# Altium PCB front_test_pcb.PcbDoc
Units mil, origin at the board's own origin, x right, y up, seen from the top; angles counter-clockwise.
Board outline 1100 x 2420 mil, 2 copper layers (Top Layer, Bottom Layer); 12 components, 27 nets, 146 pads, 5 vias.
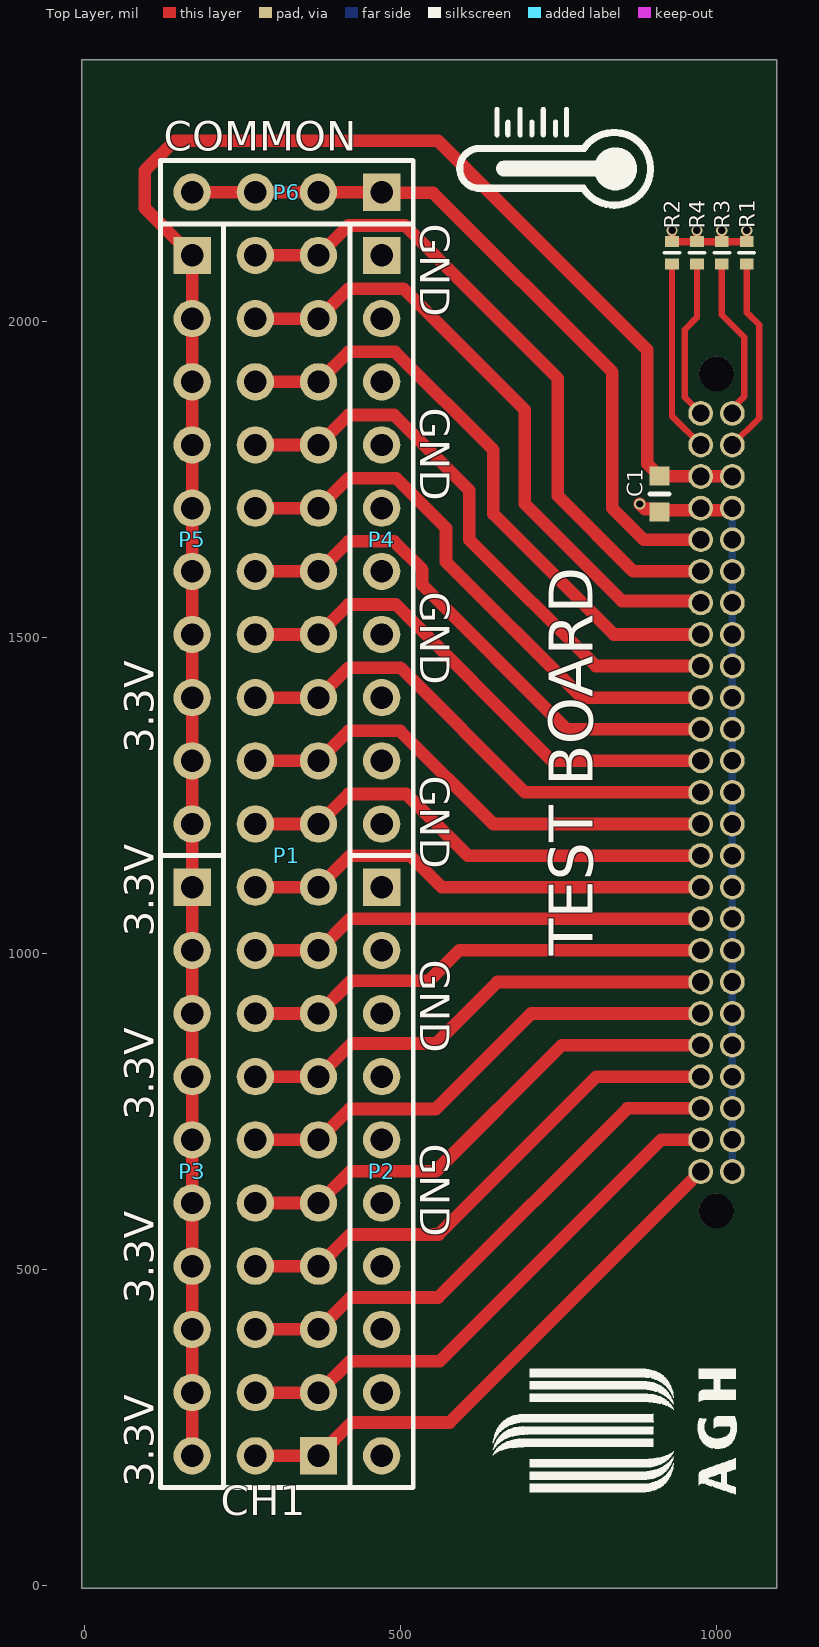
[diagram p0: Top Layer view]
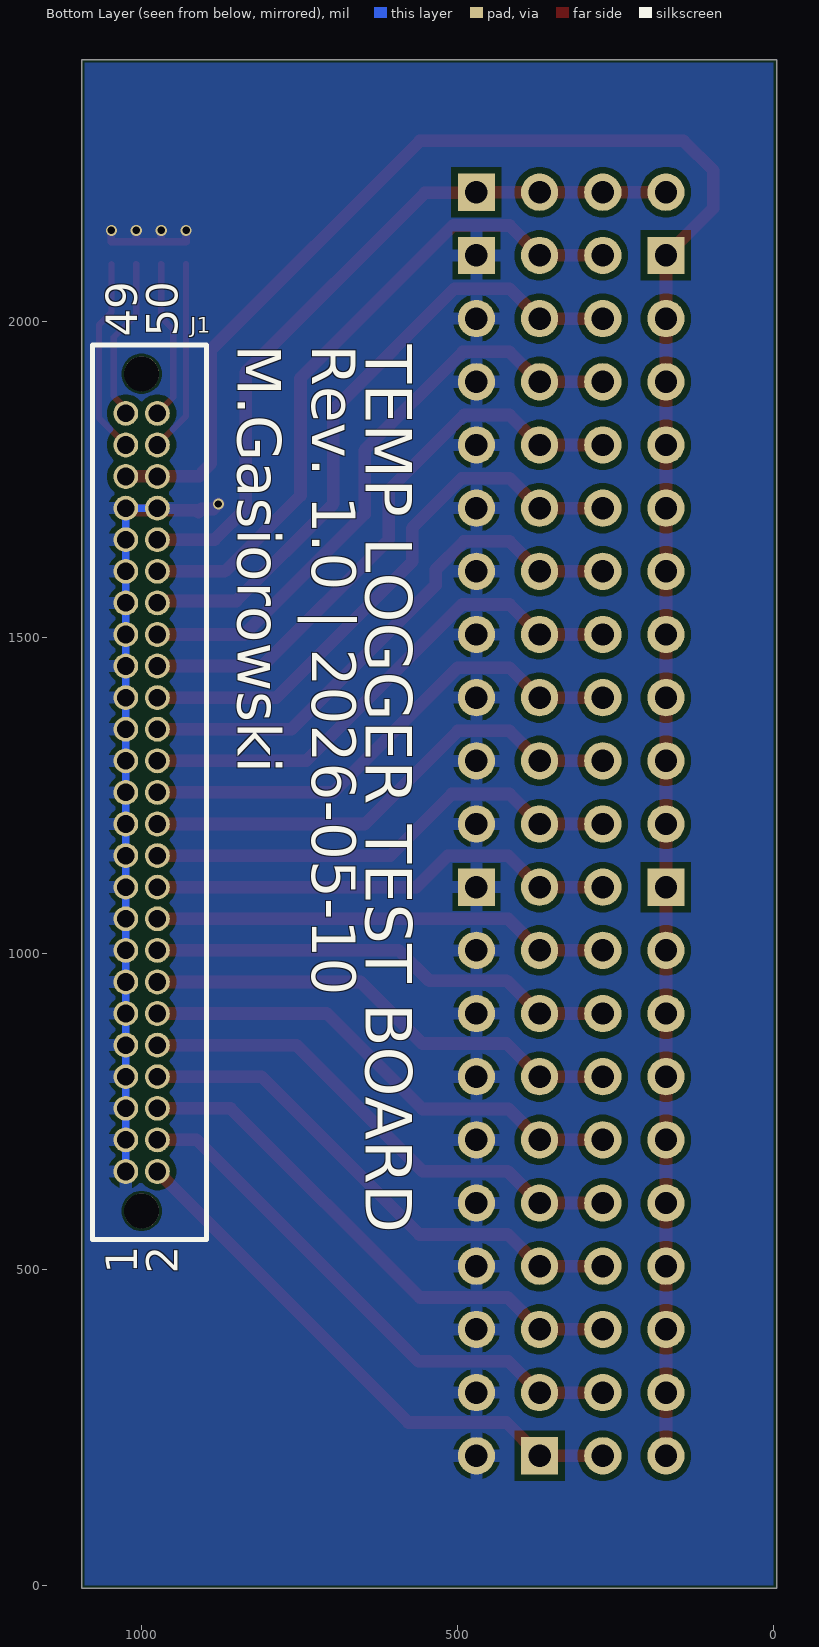
[diagram p1: Bottom Layer view, seen from below]
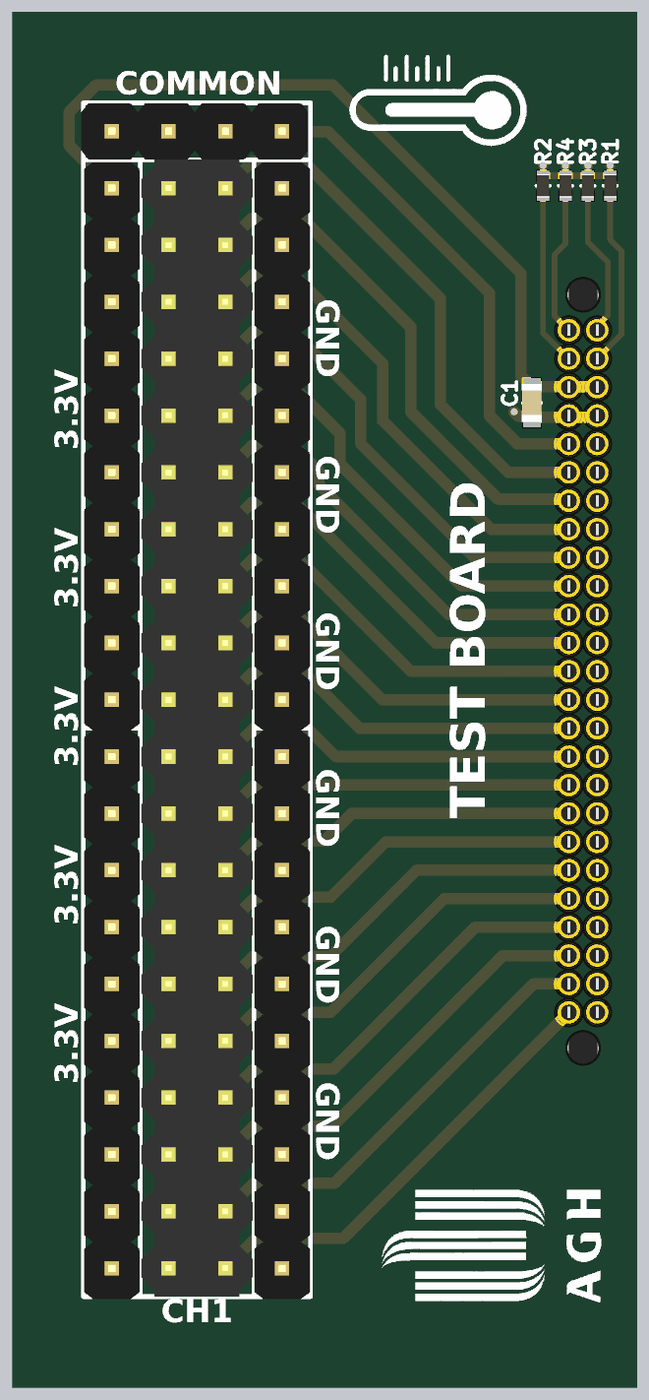
[diagram p2: 3D render of the assembled board from above, using the file's embedded part models]

## Layer stack, top to bottom
Top Solder: solder mask 0.4, Solder Resist, Dk 3.5
Top Layer: signal copper 1.4
Dielectric 1: dielectric 12.6, FR-4, Dk 4.8
Bottom Layer: signal copper 1.4
Bottom Solder: solder mask 0.4, Solder Resist, Dk 3.5

## Board outline
-5,-5 -5,2415 1095,2415 1095,-5

## Design rules (kind name [scope] priority, off if disabled: settings)
Clearance [All] p1: gap=4 ignorepadtopadclearanceinfootprint=FALSE except(3.15: Arc-SMDPad Track-SMDPad; 3.94: SMDPad-SMDPad; 4.72: THPad-THPad; 4.88: Arc-Via Track-Via SMDPad-Via THPad-Via Via-Via; 5: Arc-Fill Track-Fill SMDPad-Fill Via-Fill Via-Poly Via-Region Fill-Fill Fill-Poly Fill-Region Poly-Poly Poly-Region Region-Region; 7.87: Arc-THPad Track-THPad SMDPad-THPad; 8: Arc-Poly Arc-Region Track-Poly Track-Region SMDPad-Poly SMDPad-Region; 10: THPad-Fill THPad-Poly THPad-Region)
ComponentClearance [All] p1: gap=7.87 collisioncheckmode=3 verticalgap=7.87 showdistances=FALSE
DiffPairsRouting [All] p1: maxlimit=10 minlimit=5.91 mostfreqgap=5.91 toplayer_minwidth=15 toplayer_maxwidth=15 toplayer_prefwidth=15 bottomlayer_minwidth=15 bottomlayer_maxwidth=15 bottomlayer_prefwidth=15 maxuncoupledlength=500
HoleSize [All] p1: absolutevalues=TRUE maxlimit=314.96 minlimit=5.91 maxpercent=80.000 minpercent=20.000
HoleSize Testpoint [All] p2: absolutevalues=TRUE maxlimit=100 minlimit=1 maxpercent=80.000 minpercent=20.000
HoleSize TestPointUsage [All] p3: absolutevalues=TRUE maxlimit=100 minlimit=1 maxpercent=80.000 minpercent=20.000
HoleToHoleClearance [All] p1: gap=7.87 allowstackedmicrovias=TRUE
MinimumAnnularRing MinimumAnnularRing_via [IsVia] p1: minimumring=2.95
MinimumAnnularRing [All] p2: minimumring=5.12
MinimumSolderMaskSliver [All] p1: minsoldermaskwidth=0
PlaneClearance [All] p1: clearance=10
PolygonConnect [All] p1: thpad.connectstyle=Relief thpad.reliefconductorwidth=20 thpad.reliefentries=4 thpad.polygonreliefangle="90 Angle" thpad.airgapwidth=8 smdpad.connectstyle=Relief smdpad.reliefconductorwidth=12 smdpad.reliefentries=4 smdpad.polygonreliefangle="90 Angle" smdpad.airgapwidth=6 via.connectstyle=Direct via.reliefconductorwidth=20 via.reliefentries=4 via.polygonreliefangle="45 Angle" via.airgapwidth=10
RoutingVias [All] p1: holewidth=5.91 width=16.14 viastyle="Through Hole" minholewidth=5.91 minwidth=11.81 maxholewidth=118.11 maxwidth=236.22
SilkToSilkClearance [All] p1: silktosilkclearance=3.94
SilkToSolderMaskClearance [IsPad] p1: minsilkscreentomaskgap=2.13 clearancetoexposedcopper=TRUE
SolderMaskExpansion SolderMaskExpansion_VIA [IsVia] p1: expansion=4 istentingtop=TRUE
SolderMaskExpansion [All] p2: expansion=2 istentingtop=FALSE
SupplyNets "Schematic Supply Nets_4" [InNet('3V3-LTC')] p1: voltage=0.000
SupplyNets "Schematic Supply Nets_3" [InNet('GND')] p2: voltage=0.000
Width Width_50Ohm [InNetClass('50')] p1: maxlimit=14.47 minlimit=14.47 preferedwidth=14.47 impedanceprofiledriven=TRUE impedanceprofileid={9B03409D-0029-451A-AE6F-A7E986651E4C} minimp=50.000000 maximp=50.000000 favimp=50.000000
Width [All] p2: maxlimit=250 minlimit=4 preferedwidth=5 minimp=40.000000 maximp=100.000000 favimp=52.000000
Width Width_TopBottomOverLayer [OnLayer('Top Overlay')] p3: maxlimit=78.74 minlimit=5.91 preferedwidth=5.91
22 further rules are at their usual default settings.

## Components (designator, comment, footprint, x,y, rotation, side; value= is the part's Value field where it differs from the comment)
C1 "Ceramic X5R" C_0603_1608 909.96,1727.28 r270 top value=22uF
J1 "SAMTEC-SFM-125-01-X-D-A" SAMTEC-SFM-125-01-X-D-A 1000,1255 r90 bottom
P1 "Goldpin male" P_HEADER_2x20_2.54 320,1155 r90 top value=DS1021-2*20SF1-1
P2 "Goldpin" P_HEADER_1x10_2.54 470,655 r270 top value=DS1021-1*10SF11
P3 "Goldpin" P_HEADER_1x10_2.54 170,655 r270 top value=DS1021-1*10SF11
P4 "Goldpin" P_HEADER_1x10_2.54 470,1655 r270 top value=DS1021-1*10SF11
P5 "Goldpin" P_HEADER_1x10_2.54 170,1655 r270 top value=DS1021-1*10SF11
P6 "Goldpin" P_HEADER_1x4_2.54 320,2205 r180 top value=DS1021-1*4SF1-1
R1 "Resistor" R_0402_1005 1047.76,2109.17 r270 top value=1k
R2 "Resistor" R_0402_1005 929.65,2109.17 r90 top value=1k
R3 "Resistor" R_0402_1005 1008.39,2109.17 r270 top value=1k
R4 "Resistor" R_0402_1005 969.02,2109.17 r90 top value=1k

## Footprints (in the part's own frame and the unit in brackets; to place one, negate y for a bottom-side part, rotate by r counter-clockwise, add the part's x,y. Pads: shape width x height; smd on the part's side, far side on the other; paste and mask are expansions set on the pad)
C_0603_1608 [mm]
  rect 0.75x0.8 smd: 1(-0.725,0) 2(0.725,0)
  silkscreen extent 0,-0.38 0,0.38, body extent -0.85,-0.45 0.85,0.45, height 0.89
P_HEADER_1x4_2.54 [mm] "Connector; Header; 4 Position; Male"
  rect 1.5x1.5 hole 0.9: 1(-3.81,0)
  round 1.5 hole 0.9: 2(-1.27,0) 3(1.27,0) 4(3.81,0)
  silkscreen extent -5.08,-1.27 5.08,1.27, body extent -4.98,-1.25 5.18,1.25, height 8.2
P_HEADER_1x10_2.54 [mm] "Connector; Header; 10 Position; Male"
  rect 1.5x1.5 hole 0.9: 1(-11.43,0)
  round 1.5 hole 0.9: 2(-8.89,0) 3(-6.35,0) 4(-3.81,0) 5(-1.27,0) 6(1.27,0) 7(3.81,0) 8(6.35,0) 9(8.89,0) 10(11.43,0)
  silkscreen extent -12.7,-1.27 12.7,1.27, body extent -12.6,-1.25 12.8,1.25, height 8.2
P_HEADER_2x20_2.54 [mm] "Connector; Header"
  rect 1.5x1.5 hole 0.9: 1(-24.13,-1.27)
  round 1.5 hole 0.9: 2(-24.13,1.27) 3(-21.59,-1.27) 4(-21.59,1.27) 5(-19.05,-1.27) 6(-19.05,1.27) 7(-16.51,-1.27) 8(-16.51,1.27) 9(-13.97,-1.27) 10(-13.97,1.27) 11(-11.43,-1.27) 12(-11.43,1.27) 13(-8.89,-1.27) 14(-8.89,1.27) 15(-6.35,-1.27) 16(-6.35,1.27) 17(-3.81,-1.27) 18(-3.81,1.27) 19(-1.27,-1.27) 20(-1.27,1.27) 21(1.27,-1.27) 22(1.27,1.27) 23(3.81,-1.27) 24(3.81,1.27) 25(6.35,-1.27) 26(6.35,1.27) 27(8.89,-1.27) 28(8.89,1.27) 29(11.43,-1.27) 30(11.43,1.27) 31(13.97,-1.27) 32(13.97,1.27) 33(16.51,-1.27) 34(16.51,1.27) 35(19.05,-1.27) 36(19.05,1.27) 37(21.59,-1.27) 38(21.59,1.27) 39(24.13,-1.27) 40(24.13,1.27)
  silkscreen extent -25.4,-2.54 25.4,2.54, body extent -25.4,-2.5 25.4,2.5, height 8.4
R_0402_1005 [mm] "Chip Resistor, 2-Leads, Body 1.00x0.50mm, IPC High Density"
  rect 0.45x0.55 smd: 1(-0.45,0) 2(0.45,0)
  silkscreen extent 0,-0.3 0,0.3, body extent -0.53,-0.28 0.53,0.28, height 0.37
SAMTEC-SFM-125-01-X-D-A [mm]
  round 1 hole 0.71: 1(-15.24,0.635) 2(-15.24,-0.635) 3(-13.97,0.635) 4(-13.97,-0.635) 5(-12.7,0.635) 6(-12.7,-0.635) 7(-11.43,0.635) 8(-11.43,-0.635) 9(-10.16,0.635) 10(-10.16,-0.635) 11(-8.89,0.635) 12(-8.89,-0.635) 13(-7.62,0.635) 14(-7.62,-0.635) 15(-6.35,0.635) 16(-6.35,-0.635) 17(-5.08,0.635) 18(-5.08,-0.635) 19(-3.81,0.635) 20(-3.81,-0.635) 21(-2.54,0.635) 22(-2.54,-0.635) 23(-1.27,0.635) 24(-1.27,-0.635) 25(0,0.635) 26(0,-0.635) 27(1.27,0.635) 28(1.27,-0.635) 29(2.54,0.635) 30(2.54,-0.635) 31(3.81,0.635) 32(3.81,-0.635) 33(5.08,0.635) 34(5.08,-0.635) 35(6.35,0.635) 36(6.35,-0.635) 37(7.62,0.635) 38(7.62,-0.635) 39(8.89,0.635) 40(8.89,-0.635) 41(10.16,0.635) 42(10.16,-0.635) 43(11.43,0.635) 44(11.43,-0.635) 45(12.7,0.635) 46(12.7,-0.635) 47(13.97,0.635) 48(13.97,-0.635) 49(15.24,0.635) 50(15.24,-0.635)
  round 1.4 hole 1.4 unplated: ""(-16.828,0) ""(16.828,0)
  silkscreen extent -17.98,-2.61 17.98,1.97, body extent -17.84,-1.52 17.84,2.16, height 4.57

## Part data
C1: library part C_22uF_10V_X5R_0603_20, "Capacitor", Dielectric=X5R, Manufacturer=Murata, Manufacturer Part Number=GRM188R61A226ME15D, Tolerance (%)=20, Voltage=10V, HelpURL=https://www.mouser.pl/datasheet/2/281/1/GRM188R61A226ME15_02A-1985787.pdf, Part Number=C_22uF_10V_X5R_0603_20, SCH_Footprint=0603, Supplier 1=TME, Supplier 2="RS Components", Supplier 3=Farnell, Supplier 4=Mouser, Supplier 5=Digi-Key, Supplier 6=LCSC, Supplier Part Number 1=GRM188R61A226ME15D, Supplier Part Number 3=2426957, Supplier Part Number 4=81-GRM188R61A226ME5D, Supplier Part Number 5=490-10476-1-ND
J1: Package=None, Availability=Unavailable, MP=SAMTEC-SFM-125-01-X-D-A, Price=None
P1: library part P_HEADER_2x20_2.54, "Pin Header", Manufacturer=Connfly, Manufacturer Part Number=DS1021-2*20SF1-1, Supplier Part Number 1=ZL202-40G, HelpURL=https://www.tme.eu/Document/cc301e58a5da78cb543a94b5a5b7f06a/DS1021.pdf, Part Number=P_HEADER_2x20_2.54, SCH_Footprint="2x20 2.54mm", Supplier 1=TME, Supplier 2="RS Components", Supplier 3=Farnell, Supplier 4=Mouser, Supplier 5=Digi-Key, Supplier 6=LCSC
P2 P3 P4 P5: library part P_HEADER_1x10_2.54, "Pin Header", Manufacturer=Connfly, Manufacturer Part Number=DS1021-1*10SF11, Supplier Part Number 1=ZL201-10G, HelpURL=http://www.tme.eu/en/Document/cc301e58a5da78cb543a94b5a5b7f06a/DS1021.pdf, Part Number=P_HEADER_1x10_2.54, SCH_Footprint="1x10 2.54mm", Supplier 1=TME, Supplier 2="RS Components", Supplier 3=Farnell, Supplier 4=Mouser, Supplier 5=Digi-Key, Supplier 6=LCSC
P6: library part P_HEADER_1x4_2.54, "Pin Header", Manufacturer=Connfly, Manufacturer Part Number=DS1021-1*4SF1-1, Supplier Part Number 1=ZL201-04G, HelpURL=http://datasheet.octopart.com/DS1021-1%2A4SF1-1-Connfly-datasheet-65537859.pdf, Part Number=P_HEADER_1x4_2.54, SCH_Footprint="1x4 2.54mm", Supplier 1=TME, Supplier 2="RS Components", Supplier 3=Farnell, Supplier 4=Mouser, Supplier 5=Digi-Key, Supplier 6=LCSC
R1 R2 R3 R4: library part R_1k_0402_1, Manufacturer=Yageo, Manufacturer Part Number=RC0402FR-071K, Power=63mW, Tolerance=1%, Voltage=50V, HelpURL=http://www.tme.eu/pl/Document/1a2bc76e2be68b3b1670068306778ce6/rc0402yageo.pdf, Part Number=R_1k_0402_1, SCH_Footprint=0402, Supplier 1=TME, Supplier 2="RS Components", Supplier 3=Farnell, Supplier 4=Mouser, Supplier 5=Digi-Key, Supplier 6=LCSC, Supplier Part Number 1=RC0402FR-071K, Supplier Part Number 3=9239235, Supplier Part Number 4=603-RC0402FR-071KP, Supplier Part Number 5=311-1.00KLRCT-ND

## Via types
v1: diameter 17.72, hole 11.81, Top Layer to Bottom Layer, tented both sides, 5 vias

## Nets (pads, with @x,y where several pads share a name; then routed paths per layer and width w, separated by ;. In a path a pad name is that pad's centre, name@x,y a point inside that pad or via, vN(x,y) a via of type N, cw(c..) or ccw(c..) an arc to the next point about the centre after c; other vN are vias at no path point)
3V3-LTC: C1.1 J1.45 J1.46 P3.1 P3.2 P3.3 P3.4 P3.5 P3.6 P3.7 P3.8 P3.9 P3.10 P5.1 P5.2 P5.3 P5.4 P5.5 P5.6 P5.7 P5.8 P5.9 P5.10 | length 3340.9
  Top Layer w20: P3.10 P3.9 P3.8 P3.7 P3.6 P3.5 P3.4 P3.3 P3.2 P3.1 P5.10 P5.9 P5.8 P5.7 P5.6 P5.5 P5.4 P5.3 P5.2 P5.1 95,2180 95,2239.09 142.24,2286.34 559.57,2286.34 890.28,1955.63 890.28,1775.51 904.21,1761.57 904.21,1760.59 908.98,1755.83 C1.1 910.37,1755.41 1024.59,1755.41 J1.45
CH1_1: J1.2 P1.1 P1.2 | length 891.4
  Top Layer w20: P1.2 P1.1 422.6,257.6 577.6,257.6 J1.2
CH2_1: J1.4 P1.3 P1.4 | length 870.7
  Top Layer w20: P1.4 P1.3 419.44,354.43 561.87,354.43 912.44,705 J1.4
CH3_1: J1.6 P1.5 P1.6 | length 850
  Top Layer w20: P1.6 P1.5 420.45,455.45 559.39,455.45 858.94,755 J1.6
CH4_1: J1.8 P1.7 P1.8 | length 829.3
  Top Layer w20: P1.8 P1.7 420.22,555.22 560.2,555.22 809.98,805 J1.8
CH5_1: J1.10 P1.9 P1.10 | length 808.6
  Top Layer w20: P1.10 P1.9 420.4,655.4 555.58,655.4 755.19,855 J1.10
CH6_1: J1.12 P1.11 P1.12 | length 787.8
  Top Layer w20: P1.12 P1.11 418.81,753.81 555.63,753.81 706.82,905 J1.12
CH7_1: J1.14 P1.13 P1.14 | length 767.1
  Top Layer w20: P1.14 P1.13 422.6,857.6 555.69,857.6 653.09,955 J1.14
CH8_1: J1.16 P1.15 P1.16 | length 746.4
  Top Layer w20: P1.16 P1.15 421.88,956.88 544.62,956.88 592.74,1005 J1.16
CH9_1: J1.18 P1.17 P1.18 | length 725.7
  Top Layer w20: P1.18 P1.17 420,1055 J1.18
CH10_1: J1.20 P1.19 P1.20 | length 746.4
  Top Layer w20: P1.20 P1.19 420,1155 515,1155 565,1105 J1.20
CH11_1: J1.22 P1.21 P1.22 | length 765
  Top Layer w20: P1.22 P1.21 417.4,1252.4 508.9,1252.4 606.3,1155 J1.22
CH12_1: J1.24 P1.23 P1.24 | length 785.7
  Top Layer w20: P1.24 P1.23 417.4,1352.4 499.23,1352.4 646.63,1205 J1.24
CH13_1: J1.26 P1.25 P1.26 | length 806.4
  Top Layer w20: P1.26 P1.25 417.4,1452.4 499.56,1452.4 696.97,1255 J1.26
CH14_1: J1.28 P1.27 P1.28 | length 827.1
  Top Layer w20: P1.28 P1.27 417.4,1552.4 492.45,1552.4 739.85,1305 J1.28
CH15_1: J1.30 P1.29 P1.30 | length 862.1
  Top Layer w20: P1.30 P1.29 417.4,1652.4 489.63,1652.4 534.35,1607.68 534.35,1583.36 762.72,1355 J1.30
CH16_1: J1.32 P1.31 P1.32 | length 899.8
  Top Layer w20: P1.32 P1.31 417.4,1752.4 492.79,1752.4 571.78,1673.41 571.78,1620 786.77,1405 J1.32
CH17_1: J1.34 P1.33 P1.34 | length 935
  Top Layer w20: P1.34 P1.33 417.4,1852.4 489.63,1852.4 608.59,1733.45 608.59,1655.37 808.95,1455 J1.34
CH18_1: J1.36 P1.35 P1.36 | length 969.1
  Top Layer w20: P1.36 P1.35 417.4,1952.4 491.27,1952.4 646.84,1796.83 646.84,1695.79 837.63,1505 J1.36
CH19_1: J1.38 P1.37 P1.38 | length 1017.8
  Top Layer w20: P1.38 P1.37 417.4,2052.4 504.59,2052.4 696.64,1860.35 696.64,1711.66 850.39,1557.92 972.08,1557.92 J1.38
CH20_1: J1.40 P1.39 P1.40 | length 1060.4
  Top Layer w20: P1.40 P1.39 417.4,2152.4 506.93,2152.4 748.54,1910.79 748.54,1724.72 868.27,1605 J1.40
COM_1: J1.42 P6.1 P6.2 P6.3 P6.4 | length 1157.8
  Top Layer w20: P6.4 P6.3 P6.2 P6.1 ; P6.1@470.99,2204.01 551.35,2204.01 835.16,1920.2 835.16,1704.51 884.67,1655 J1.42
GND: C1.2 J1.1 J1.3 J1.5 J1.7 J1.9 J1.11 J1.13 J1.15 J1.17 J1.19 J1.21 J1.23 J1.25 J1.27 J1.29 J1.31 J1.33 J1.35 J1.37 J1.39 J1.41 J1.43 J1.44 P2.1 P2.2 P2.3 P2.4 P2.5 P2.6 P2.7 P2.8 P2.9 P2.10 P4.1 P4.2 P4.3 P4.4 P4.5 P4.6 P4.7 P4.8 P4.9 P4.10 R1.1 R2.2 R3.1 R4.2 | length 1442.1
  Top Layer w12: v1(929.65,2144.61) R2.2 R1.1 v1(1047.76,2144.61) ; R4.2 v1(969.02,2144.61) ; R3.1 v1(1008.39,2144.61)
  Top Layer w20: v1(878.46,1711.54) 886.5,1703.5 905.2,1703.5 C1.2 ; C1.2@909.96,1701.87 1021.87,1701.87 J1.43
  Bottom Layer w12: J1.44 J1.43 J1.41 J1.39 J1.37 J1.35 J1.33 J1.31 J1.29 J1.27 J1.25 J1.23 J1.21 J1.19 J1.17 J1.15 J1.13 J1.11 J1.9 J1.7 J1.5 J1.3 J1.1
HW_ID0_1: J1.50 R4.1 | length 255
  Top Layer w10: R4.1 969.02,2006.81 949.65,1987.44 949.65,1880.35 J1.50
HW_ID1_1: J1.48 R2.1 | length 305.2
  Top Layer w10: R2.1 929.65,1850.35 J1.48
HW_ID2_1: J1.47 R1.2 | length 312.2
  Top Layer w10: J1.47 1067.44,1847.44 1067.44,1995 1047.76,2014.68 R1.2
HW_ID3_1: J1.49 R3.2 | length 258.9
  Top Layer w10: R3.2 1008.39,2010.83 1043.82,1975.4 1043.82,1881.77 1025,1862.95 J1.49
pads on no net: J1.

## Polygon pours and split planes (outlines as drawn)
GND on Bottom Layer "NONET_L-01_P-001" (solid, pour order 0): 1090,0 1090,2410 0,2410 0,0

## Silkscreen, mask and mechanical layers (free items; w line width, h text height)
Top Overlay:
  drawing of 27 lines, arcs and shapes, not listed
  text "COMMON" at 125,2255 h80
  text "GND       GND       GND       GND       GND       GND" at 515,2155 h80 r270
  text "TEST BOARD" at 826.98,996.11 h120 r90
  text "3.3V       3.3V       3.3V       3.3V       3.3V" at 125,155 h80 r90
  text "CH1" at 215,95 h80
Bottom Overlay:
  text "TEMP LOGGER TEST BOARD" at 669.8,1963.5 h125.98 r90
  text "Rev. 1.0 | 2026-05-10 / M.Gasiorowski" at 870.59,1963.5 h118.11 r90
Mechanical 1:
  the board outline again, w10

## Text inside footprints (layer, text, board x,y; h text height)
J1: Bottom Overlay "1" at 1007.01,493.23 h50 r270; Bottom Overlay "2" at 942.99,493.23 h50 r270; Bottom Overlay "49" at 1007.01,1976.22 h50 r270; Bottom Overlay "50" at 942.99,1976.22 h50 r270; Mechanical 13 "3.048" at 995,296.5 h10 r270; Mechanical 13 "1.270" at 995,366.5 h10 r270; Mechanical 13 "1.270" at 850,551.5 h10 r270; Mechanical 13 "0.635" at 882.52,459.02 h10 r270; Mechanical 13 "1" at 1007.01,493.23 h50 r270; Mechanical 13 "2" at 942.99,493.23 h50 r270; Mechanical 13 "1.587" at 1167.48,504.02 h10 r270; Mechanical 13 "34.925" at 775,1223.5 h10 r270; Mechanical 13 "30.480" at 810,1223.5 h10 r270; Mechanical 13 "33.655" at 822.52,1223.5 h10 r270; Mechanical 13 "32.131" at 1157.48,1223.5 h10 r270; Mechanical 13 "49" at 1007.01,1976.22 h50 r270; Mechanical 13 "50" at 942.99,1976.22 h50 r270; Mechanical 13 "3.683" at 982.52,2021.5 h10 r270